# Altium PCB FlexLED.PcbDoc
Units mm, origin at the board's own origin, x right, y up, seen from the top; angles counter-clockwise.
Board outline 150 x 4 mm, 2 copper layers (Top Layer, Bottom Layer); 79 components, 154 nets, 466 pads, 150 vias.
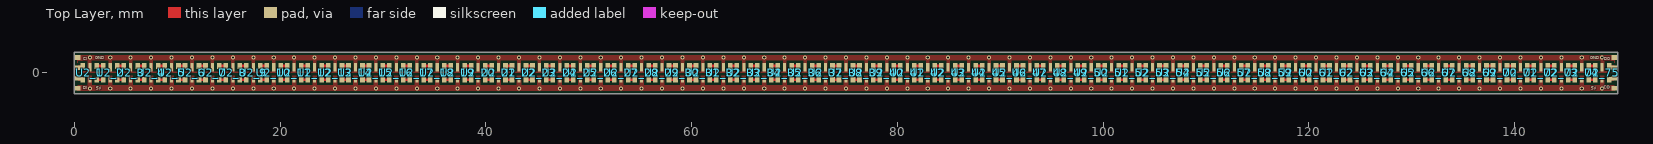
[diagram p0: Top Layer view]
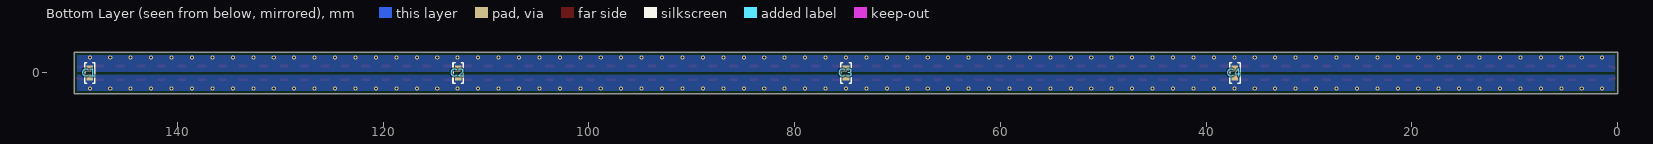
[diagram p1: Bottom Layer view, seen from below]
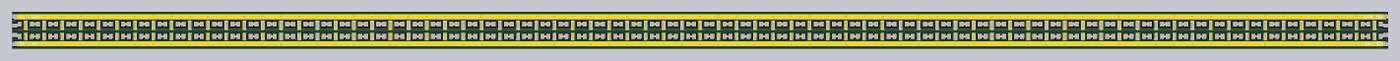
[diagram p2: 3D render of the assembled board from above, using the file's embedded part models]
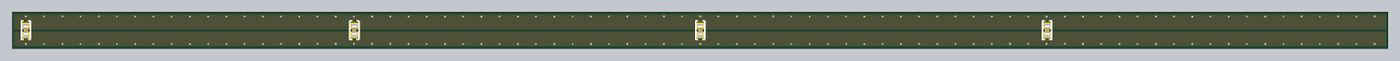
[diagram p3: 3D render of the assembled board from below, using the file's embedded part models]

## Layer stack, top to bottom
Top Solder: solder mask 0.0102, Solder Resist, Dk 3.5
Top Layer: signal copper 0.0356
Dielectric 1: dielectric 0.32, FR-4, Dk 4.8
Bottom Layer: signal copper 0.0356
Bottom Solder: solder mask 0.0102, Solder Resist, Dk 3.5

## Board outline
0,-2 0,2 150,2 150,-2

## Design rules (kind name [scope] priority, off if disabled: settings)
BoardOutlineClearance [All] p1: gap=0.254 ignorepadtopadclearanceinfootprint=FALSE except(0: Arc-SplitContinuation Track-SplitContinuation SMDPad-SplitContinuation THPad-SplitContinuation Via-SplitContinuation Fill-SplitContinuation Poly-SplitContinuation Region-SplitContinuation Text-SplitContinuation)
Clearance [All] p1: gap=0.254 ignorepadtopadclearanceinfootprint=FALSE except(0: Arc-Hole Track-Hole SMDPad-Hole THPad-Hole Via-Hole Fill-Hole Poly-Hole Region-Hole Text-Hole)
PolygonConnect [All] p1: connectstyle=Direct reliefconductorwidth=0.254 reliefentries=4 polygonreliefangle="90 Angle" airgapwidth=0.254
RoutingVias [All] p1: holewidth=0.711 width=1.27 viastyle="Through Hole" minholewidth=0.711 minwidth=1.27 maxholewidth=0.711 maxwidth=1.27
SolderMaskExpansion [All] p1: expansion=0.102 istentingtop=FALSE
Width [All] p1: maxlimit=0.254 minlimit=0.254 preferedwidth=0.254
30 further rules are at their usual default settings.

## Classes and differential pairs
component class top: C1 C2 C3 C4
component class U_APA10275: U2_75
component class U_APA10274: U2_74
component class U_APA10273: U2_73
component class U_APA10272: U2_72
component class U_APA10271: U2_71
component class U_APA10270: U2_70
component class U_APA10269: U2_69
component class U_APA10268: U2_68
component class U_APA10267: U2_67
component class U_APA10266: U2_66
channel class APA102: U_APA1021 U_APA1022 U_APA1023 U_APA1024 U_APA1025 U_APA1026 U_APA1027 U_APA1028 U_APA1029 U_APA10210 U_APA10211 U_APA10212 U_APA10213 U_APA10214 U_APA10215 U_APA10216 U_APA10217 U_APA10218 U_APA10219 U_APA10220 U_APA10221 U_APA10222 U_APA10223 U_APA10224 U_APA10225 U_APA10226 U_APA10227 U_APA10228 U_APA10229 U_APA10230 U_APA10231 U_APA10232 U_APA10233 U_APA10234 U_APA10235 U_APA10236 U_APA10237 U_APA10238 U_APA10239 U_APA10240 U_APA10241 U_APA10242 U_APA10243 U_APA10244 U_APA10245 U_APA10246 U_APA10247 U_APA10248 U_APA10249 U_APA10250 U_APA10251 U_APA10252 U_APA10253 U_APA10254 U_APA10255 U_APA10256 U_APA10257 U_APA10258 U_APA10259 U_APA10260 U_APA10261 U_APA10262 U_APA10263 U_APA10264 U_APA10265
net class DI[2..75]: DI2 DI3 DI4 DI5 DI6 DI7 DI8 DI9 DI10 DI11 DI12 DI13 DI14 DI15 DI16 DI17 DI18 DI19 DI20 DI21 DI22 DI23 DI24 DI25 DI26 DI27 DI28 DI29 DI30 DI31 DI32 DI33 DI34 DI35 DI36 DI37 DI38 DI39 DI40 DI41 DI42 DI43 DI44 DI45 DI46 DI47 DI48 DI49 DI50 DI51 DI52 DI53 DI54 DI55 DI56 DI57 DI58 DI59 DI60 DI61 DI62 DI63 DI64 DI65 DI66 DI67 DI68 DI69 DI70 DI71 DI72 DI73 DI74 DI75
net class CI[2..75]: CI2 CI3 CI4 CI5 CI6 CI7 CI8 CI9 CI10 CI11 CI12 CI13 CI14 CI15 CI16 CI17 CI18 CI19 CI20 CI21 CI22 CI23 CI24 CI25 CI26 CI27 CI28 CI29 CI30 CI31 CI32 CI33 CI34 CI35 CI36 CI37 CI38 CI39 CI40 CI41 CI42 CI43 CI44 CI45 CI46 CI47 CI48 CI49 CI50 CI51 CI52 CI53 CI54 CI55 CI56 CI57 CI58 CI59 CI60 CI61 CI62 CI63 CI64 CI65 CI66 CI67 CI68 CI69 CI70 CI71 CI72 CI73 CI74 CI75
component class U_APA10265: U2_65
component class U_APA10264: U2_64
component class U_APA10263: U2_63
component class U_APA10262: U2_62
component class U_APA10261: U2_61
component class U_APA10260: U2_60
component class U_APA10259: U2_59
component class U_APA10258: U2_58
component class U_APA10257: U2_57
component class U_APA10256: U2_56
component class U_APA10255: U2_55
component class U_APA10254: U2_54
component class U_APA10253: U2_53
component class U_APA10252: U2_52
component class U_APA10251: U2_51
component class U_APA10250: U2_50
component class U_APA10249: U2_49
component class U_APA10248: U2_48
component class U_APA10247: U2_47
component class U_APA10246: U2_46
component class U_APA10245: U2_45
component class U_APA10244: U2_44
component class U_APA10243: U2_43
component class U_APA10242: U2_42
component class U_APA10241: U2_41
component class U_APA10240: U2_40
component class U_APA10239: U2_39
component class U_APA10238: U2_38
component class U_APA10237: U2_37
component class U_APA10236: U2_36
component class U_APA10235: U2_35
component class U_APA10234: U2_34
component class U_APA10233: U2_33
component class U_APA10232: U2_32
component class U_APA10231: U2_31
component class U_APA10230: U2_30
component class U_APA10229: U2_29
component class U_APA10228: U2_28
component class U_APA10227: U2_27
component class U_APA10226: U2_26
component class U_APA10225: U2_25
component class U_APA10224: U2_24
component class U_APA10223: U2_23
component class U_APA10222: U2_22
component class U_APA10221: U2_21
component class U_APA10220: U2_20
component class U_APA10219: U2_19
component class U_APA10218: U2_18
component class U_APA10217: U2_17
component class U_APA10216: U2_16
component class U_APA10215: U2_15
component class U_APA10214: U2_14
component class U_APA10213: U2_13
component class U_APA10212: U2_12
component class U_APA10211: U2_11
component class U_APA10210: U2_10
component class U_APA1029: U2_9
component class U_APA1028: U2_8
component class U_APA1027: U2_7
component class U_APA1026: U2_6
component class U_APA1025: U2_5
component class U_APA1024: U2_4
component class U_APA1023: U2_3
component class U_APA1022: U2_2
component class U_APA1021: U2_1

## Components (designator, comment, footprint, x,y, rotation, side; value= is the part's Value field where it differs from the comment)
C1 "0.1µF" "CAP 0402_1005" 148.5,0 r270 bottom
C2 "0.1µF" "CAP 0402_1005" 112.7,0 r270 bottom
C3 "0.1µF" "CAP 0402_1005" 75,0 r270 bottom
C4 "0.1µF" "CAP 0402_1005" 37.2,0 r270 bottom
U2_1 "APA 102 2020" LED_APA-102-1515 1.5,0 r180 top (schematic designator U2)
U2_2 "APA 102 2020" LED_APA-102-1515 3.486,0 r180 top (schematic designator U2)
U2_3 "APA 102 2020" LED_APA-102-1515 5.473,0 r180 top (schematic designator U2)
U2_4 "APA 102 2020" LED_APA-102-1515 7.459,0 r180 top (schematic designator U2)
U2_5 "APA 102 2020" LED_APA-102-1515 9.446,0 r180 top (schematic designator U2)
U2_6 "APA 102 2020" LED_APA-102-1515 11.432,0 r180 top (schematic designator U2)
U2_7 "APA 102 2020" LED_APA-102-1515 13.419,0 r180 top (schematic designator U2)
U2_8 "APA 102 2020" LED_APA-102-1515 15.405,0 r180 top (schematic designator U2)
U2_9 "APA 102 2020" LED_APA-102-1515 17.392,0 r180 top (schematic designator U2)
U2_10 "APA 102 2020" LED_APA-102-1515 19.378,0 r180 top (schematic designator U2)
U2_11 "APA 102 2020" LED_APA-102-1515 21.365,0 r180 top (schematic designator U2)
U2_12 "APA 102 2020" LED_APA-102-1515 23.351,0 r180 top (schematic designator U2)
U2_13 "APA 102 2020" LED_APA-102-1515 25.338,0 r180 top (schematic designator U2)
U2_14 "APA 102 2020" LED_APA-102-1515 27.324,0 r180 top (schematic designator U2)
U2_15 "APA 102 2020" LED_APA-102-1515 29.311,0 r180 top (schematic designator U2)
U2_16 "APA 102 2020" LED_APA-102-1515 31.297,0 r180 top (schematic designator U2)
U2_17 "APA 102 2020" LED_APA-102-1515 33.284,0 r180 top (schematic designator U2)
U2_18 "APA 102 2020" LED_APA-102-1515 35.27,0 r180 top (schematic designator U2)
U2_19 "APA 102 2020" LED_APA-102-1515 37.257,0 r180 top (schematic designator U2)
U2_20 "APA 102 2020" LED_APA-102-1515 39.243,0 r180 top (schematic designator U2)
U2_21 "APA 102 2020" LED_APA-102-1515 41.23,0 r180 top (schematic designator U2)
U2_22 "APA 102 2020" LED_APA-102-1515 43.216,0 r180 top (schematic designator U2)
U2_23 "APA 102 2020" LED_APA-102-1515 45.203,0 r180 top (schematic designator U2)
U2_24 "APA 102 2020" LED_APA-102-1515 47.189,0 r180 top (schematic designator U2)
U2_25 "APA 102 2020" LED_APA-102-1515 49.176,0 r180 top (schematic designator U2)
U2_26 "APA 102 2020" LED_APA-102-1515 51.162,0 r180 top (schematic designator U2)
U2_27 "APA 102 2020" LED_APA-102-1515 53.149,0 r180 top (schematic designator U2)
U2_28 "APA 102 2020" LED_APA-102-1515 55.135,0 r180 top (schematic designator U2)
U2_29 "APA 102 2020" LED_APA-102-1515 57.122,0 r180 top (schematic designator U2)
U2_30 "APA 102 2020" LED_APA-102-1515 59.108,0 r180 top (schematic designator U2)
U2_31 "APA 102 2020" LED_APA-102-1515 61.095,0 r180 top (schematic designator U2)
U2_32 "APA 102 2020" LED_APA-102-1515 63.081,0 r180 top (schematic designator U2)
U2_33 "APA 102 2020" LED_APA-102-1515 65.068,0 r180 top (schematic designator U2)
U2_34 "APA 102 2020" LED_APA-102-1515 67.054,0 r180 top (schematic designator U2)
U2_35 "APA 102 2020" LED_APA-102-1515 69.041,0 r180 top (schematic designator U2)
U2_36 "APA 102 2020" LED_APA-102-1515 71.027,0 r180 top (schematic designator U2)
U2_37 "APA 102 2020" LED_APA-102-1515 73.013,0 r180 top (schematic designator U2)
U2_38 "APA 102 2020" LED_APA-102-1515 75,0 r180 top (schematic designator U2)
U2_39 "APA 102 2020" LED_APA-102-1515 76.986,0 r180 top (schematic designator U2)
U2_40 "APA 102 2020" LED_APA-102-1515 78.973,0 r180 top (schematic designator U2)
U2_41 "APA 102 2020" LED_APA-102-1515 80.959,0 r180 top (schematic designator U2)
U2_42 "APA 102 2020" LED_APA-102-1515 82.946,0 r180 top (schematic designator U2)
U2_43 "APA 102 2020" LED_APA-102-1515 84.932,0 r180 top (schematic designator U2)
U2_44 "APA 102 2020" LED_APA-102-1515 86.919,0 r180 top (schematic designator U2)
U2_45 "APA 102 2020" LED_APA-102-1515 88.905,0 r180 top (schematic designator U2)
U2_46 "APA 102 2020" LED_APA-102-1515 90.892,0 r180 top (schematic designator U2)
U2_47 "APA 102 2020" LED_APA-102-1515 92.878,0 r180 top (schematic designator U2)
U2_48 "APA 102 2020" LED_APA-102-1515 94.865,0 r180 top (schematic designator U2)
U2_49 "APA 102 2020" LED_APA-102-1515 96.851,0 r180 top (schematic designator U2)
U2_50 "APA 102 2020" LED_APA-102-1515 98.838,0 r180 top (schematic designator U2)
U2_51 "APA 102 2020" LED_APA-102-1515 100.824,0 r180 top (schematic designator U2)
U2_52 "APA 102 2020" LED_APA-102-1515 102.811,0 r180 top (schematic designator U2)
U2_53 "APA 102 2020" LED_APA-102-1515 104.797,0 r180 top (schematic designator U2)
U2_54 "APA 102 2020" LED_APA-102-1515 106.784,0 r180 top (schematic designator U2)
U2_55 "APA 102 2020" LED_APA-102-1515 108.77,0 r180 top (schematic designator U2)
U2_56 "APA 102 2020" LED_APA-102-1515 110.757,0 r180 top (schematic designator U2)
U2_57 "APA 102 2020" LED_APA-102-1515 112.743,0 r180 top (schematic designator U2)
U2_58 "APA 102 2020" LED_APA-102-1515 114.73,0 r180 top (schematic designator U2)
U2_59 "APA 102 2020" LED_APA-102-1515 116.716,0 r180 top (schematic designator U2)
U2_60 "APA 102 2020" LED_APA-102-1515 118.703,0 r180 top (schematic designator U2)
U2_61 "APA 102 2020" LED_APA-102-1515 120.689,0 r180 top (schematic designator U2)
U2_62 "APA 102 2020" LED_APA-102-1515 122.676,0 r180 top (schematic designator U2)
U2_63 "APA 102 2020" LED_APA-102-1515 124.662,0 r180 top (schematic designator U2)
U2_64 "APA 102 2020" LED_APA-102-1515 126.649,0 r180 top (schematic designator U2)
U2_65 "APA 102 2020" LED_APA-102-1515 128.635,0 r180 top (schematic designator U2)
U2_66 "APA 102 2020" LED_APA-102-1515 130.622,0 r180 top (schematic designator U2)
U2_67 "APA 102 2020" LED_APA-102-1515 132.608,0 r180 top (schematic designator U2)
U2_68 "APA 102 2020" LED_APA-102-1515 134.595,0 r180 top (schematic designator U2)
U2_69 "APA 102 2020" LED_APA-102-1515 136.581,0 r180 top (schematic designator U2)
U2_70 "APA 102 2020" LED_APA-102-1515 138.568,0 r180 top (schematic designator U2)
U2_71 "APA 102 2020" LED_APA-102-1515 140.554,0 r180 top (schematic designator U2)
U2_72 "APA 102 2020" LED_APA-102-1515 142.54,0 r180 top (schematic designator U2)
U2_73 "APA 102 2020" LED_APA-102-1515 144.527,0 r180 top (schematic designator U2)
U2_74 "APA 102 2020" LED_APA-102-1515 146.513,0 r180 top (schematic designator U2)
U2_75 "APA 102 2020" LED_APA-102-1515 148.5,0 r180 top (schematic designator U2)

## Footprints (in the part's own frame and the unit in brackets; to place one, negate y for a bottom-side part, rotate by r counter-clockwise, add the part's x,y. Pads: shape width x height; smd on the part's side, far side on the other; paste and mask are expansions set on the pad)
"CAP 0402_1005" [mm] "Chip Capacitor, 2-Leads, Body 1.02x0.51mm, IPC Medium Density"
  rect 0.6x0.64 smd: 1(-0.44,0) 2(0.44,0)
  silkscreen extent -1,-0.5 1,0.5, body extent -0.5,-0.26 0.5,0.26, height 0.52
LED_APA-102-1515 [mm]
  rect 0.3x0.8 smd: 1(0,-0.55)
  rect 0.45x0.55 smd: 2(-0.675,-0.675) 3(-0.675,0.675) 5(0.675,0.675) 6(0.675,-0.675)
  rect 0.3x0.55 smd: 4(0,0.675)
  body extent -0.8,-0.8 0.8,0.8, height 0.9

## Part data
C1 C2 C3 C4: library part VJ0402V104ZXJCW1BC, "CAP CER 0.1UF 16V Y5V 0402", Device Package="0402 (1005 Metric)", Manufacturer="Vishay Vitramon", Operating Temperature="-30°C ~ 85°C", Supplier Part Number 1=720-1523-1-ND, Temperature Coefficient="Y5V (F)", Tolerance="-20%, +80%", Voltage - Rated=16V, Applications="General Purpose", Capacitance=0.1µF, ComponentLink1Description=Datasheet, ComponentLink1URL=https://www.vishay.com/docs/28548/vjw1bcbascomseries.pdf, ComponentLink2Description="DigiKey Link", ComponentLink2URL=http://digikey.com/product-detail/en/vishay-vitramon/VJ0402V104ZXJCW1BC/720-1523-1-ND/420979, LastUpdated="9/2/2020 1:01:27 AM", Lifecycle Status=Active, Minimum Order=1, Mounting Type="Surface Mount, MLCC", Package / Case="0402 (1005 Metric)", Packaging=TapeAndReel, Part Number=VJ0402V104ZXJCW1BC, Part Status=Active, PartId=12979, Price=0.01, Series=VJ, Size / Dimension="0.039\" L x 0.020\" W (1.00mm x 0.50mm)", Supplier 1=DigiKey, Thickness (Max)="0.022\" (0.55mm)"
U2_1 U2_2 U2_3 U2_4 U2_5 U2_6 U2_7 U2_8 U2_9 U2_10 U2_11 U2_12 U2_13 U2_14 U2_15 U2_16 U2_17 U2_18 U2_19 U2_20 U2_21 U2_22 U2_23 U2_24 U2_25 U2_26 U2_27 U2_28 U2_29 U2_30 U2_31 U2_32 U2_33 U2_34 U2_35 U2_36 U2_37 U2_38 U2_39 U2_40 U2_41 U2_42 U2_43 U2_44 U2_45 U2_46 U2_47 U2_48 U2_49 U2_50 U2_51 U2_52 U2_53 U2_54 U2_55 U2_56 U2_57 U2_58 U2_59 U2_60 U2_61 U2_62 U2_63 U2_64 U2_65 U2_66 U2_67 U2_68 U2_69 U2_70 U2_71 U2_72 U2_73 U2_74 U2_75: library part APA-102-1515, "8-pin type LED three-color RGB Dimming control", Package="SMD-8 iPixel LED Light Co.", Availability=Unavailable, MF="iPixel LED Light Co.", MP=APA-102-2020-256-8, Price=None, SnapEDA_Link=https://www.snapeda.com/parts/APA-102-2020-256-8/iPixel%20LED%20Light%20Co./view-part/698331/?ref=snap

## Free pads (board coordinates)
  rect 0.55x0.45 smd: 2(0.3,-1.5) 2(0.3,-0.5) 2(0.3,0.5) 2(0.3,1.5) 2(149.7,-1.5) 2(149.7,-0.5) 2(149.7,0.5) 2(149.7,1.5)

## Via types
v1: diameter 0.4, hole 0.2, Top Layer to Bottom Layer, tented both sides, 150 vias

## Nets (pads, with @x,y where several pads share a name; then routed paths per layer and width w, separated by ;. In a path a pad name is that pad's centre, name@x,y a point inside that pad or via, vN(x,y) a via of type N, cw(c..) or ccw(c..) an arc to the next point about the centre after c; other vN are vias at no path point)
5V: C1.2 C2.2 C3.2 C4.2 pad.2@0.3,-1.5 pad.2@149.7,-1.5 U2_1.4 U2_2.4 U2_3.4 U2_4.4 U2_5.4 U2_6.4 U2_7.4 U2_8.4 U2_9.4 U2_10.4 U2_11.4 U2_12.4 U2_13.4 U2_14.4 U2_15.4 U2_16.4 U2_17.4 U2_18.4 U2_19.4 U2_20.4 U2_21.4 U2_22.4 U2_23.4 U2_24.4 U2_25.4 U2_26.4 U2_27.4 U2_28.4 U2_29.4 U2_30.4 U2_31.4 U2_32.4 U2_33.4 U2_34.4 U2_35.4 U2_36.4 U2_37.4 U2_38.4 U2_39.4 U2_40.4 U2_41.4 U2_42.4 U2_43.4 U2_44.4 U2_45.4 U2_46.4 U2_47.4 U2_48.4 U2_49.4 U2_50.4 U2_51.4 U2_52.4 U2_53.4 U2_54.4 U2_55.4 U2_56.4 U2_57.4 U2_58.4 U2_59.4 U2_60.4 U2_61.4 U2_62.4 U2_63.4 U2_64.4 U2_65.4 U2_66.4 U2_67.4 U2_68.4 U2_69.4 U2_70.4 U2_71.4 U2_72.4 U2_73.4 U2_74.4 U2_75.4
  other v1: 1.5,-1.5 3.486,-1.5 5.473,-1.5 7.459,-1.5 9.446,-1.5 11.432,-1.5 13.419,-1.5 15.405,-1.5 17.392,-1.5 19.378,-1.5 21.365,-1.5 23.351,-1.5 25.338,-1.5 27.324,-1.5 29.311,-1.5 31.297,-1.5 33.284,-1.5 35.27,-1.5 37.257,-1.5 39.243,-1.5 41.23,-1.5 43.216,-1.5 45.203,-1.5 47.189,-1.5 49.176,-1.5 51.162,-1.5 53.149,-1.5 55.135,-1.5 57.122,-1.5 59.108,-1.5 61.095,-1.5 63.081,-1.5 65.068,-1.5 67.054,-1.5 69.041,-1.5 71.027,-1.5 73.013,-1.5 75,-1.5 76.986,-1.5 78.973,-1.5 80.959,-1.5 82.946,-1.5 84.932,-1.5 86.919,-1.5 88.905,-1.5 90.892,-1.5 92.878,-1.5 94.865,-1.5 96.851,-1.5 98.838,-1.5 100.824,-1.5 102.811,-1.5 104.797,-1.5 106.784,-1.5 108.77,-1.5 110.757,-1.5 112.743,-1.5 114.73,-1.5 116.716,-1.5 118.703,-1.5 120.689,-1.5 122.676,-1.5 124.662,-1.5 126.649,-1.5 128.635,-1.5 130.622,-1.5 132.608,-1.5 134.595,-1.5 136.581,-1.5 138.568,-1.5 140.554,-1.5 142.54,-1.5 144.527,-1.5 146.513,-1.5 148.5,-1.5
CI1: pad.2@0.3,-0.5 U2_1.5 | length 0.6
  Top Layer w0.254: pad.2@0.3,-0.5 0.448,-0.598 0.727,-0.598 U2_1.5
CI2: U2_1.3 U2_2.5 | length 0.6
  Top Layer w0.254: U2_1.3 U2_2.5
CI3: U2_2.3 U2_3.5 | length 0.6
  Top Layer w0.254: U2_2.3 U2_3.5
CI4: U2_3.3 U2_4.5 | length 0.6
  Top Layer w0.254: U2_3.3 U2_4.5
CI5: U2_4.3 U2_5.5 | length 0.6
  Top Layer w0.254: U2_4.3 U2_5.5
CI6: U2_5.3 U2_6.5 | length 0.6
  Top Layer w0.254: U2_5.3 U2_6.5
CI7: U2_6.3 U2_7.5 | length 0.6
  Top Layer w0.254: U2_6.3 U2_7.5
CI8: U2_7.3 U2_8.5 | length 0.6
  Top Layer w0.254: U2_7.3 U2_8.5
CI9: U2_8.3 U2_9.5 | length 0.6
  Top Layer w0.254: U2_8.3 U2_9.5
CI10: U2_9.3 U2_10.5 | length 0.6
  Top Layer w0.254: U2_9.3 U2_10.5
CI11: U2_10.3 U2_11.5 | length 0.6
  Top Layer w0.254: U2_10.3 U2_11.5
CI12: U2_11.3 U2_12.5 | length 0.6
  Top Layer w0.254: U2_11.3 U2_12.5
CI13: U2_12.3 U2_13.5 | length 0.6
  Top Layer w0.254: U2_12.3 U2_13.5
CI14: U2_13.3 U2_14.5 | length 0.6
  Top Layer w0.254: U2_13.3 U2_14.5
CI15: U2_14.3 U2_15.5 | length 0.6
  Top Layer w0.254: U2_14.3 U2_15.5
CI16: U2_15.3 U2_16.5 | length 0.6
  Top Layer w0.254: U2_15.3 U2_16.5
CI17: U2_16.3 U2_17.5 | length 0.6
  Top Layer w0.254: U2_16.3 U2_17.5
CI18: U2_17.3 U2_18.5 | length 0.6
  Top Layer w0.254: U2_17.3 U2_18.5
CI19: U2_18.3 U2_19.5 | length 0.6
  Top Layer w0.254: U2_18.3 U2_19.5
CI20: U2_19.3 U2_20.5 | length 0.6
  Top Layer w0.254: U2_19.3 U2_20.5
CI21: U2_20.3 U2_21.5 | length 0.6
  Top Layer w0.254: U2_20.3 U2_21.5
CI22: U2_21.3 U2_22.5 | length 0.6
  Top Layer w0.254: U2_21.3 U2_22.5
CI23: U2_22.3 U2_23.5 | length 0.6
  Top Layer w0.254: U2_22.3 U2_23.5
CI24: U2_23.3 U2_24.5 | length 0.6
  Top Layer w0.254: U2_23.3 U2_24.5
CI25: U2_24.3 U2_25.5 | length 0.6
  Top Layer w0.254: U2_24.3 U2_25.5
CI26: U2_25.3 U2_26.5 | length 0.6
  Top Layer w0.254: U2_25.3 U2_26.5
CI27: U2_26.3 U2_27.5 | length 0.6
  Top Layer w0.254: U2_26.3 U2_27.5
CI28: U2_27.3 U2_28.5 | length 0.6
  Top Layer w0.254: U2_27.3 U2_28.5
CI29: U2_28.3 U2_29.5 | length 0.6
  Top Layer w0.254: U2_28.3 U2_29.5
CI30: U2_29.3 U2_30.5 | length 0.6
  Top Layer w0.254: U2_29.3 U2_30.5
CI31: U2_30.3 U2_31.5 | length 0.6
  Top Layer w0.254: U2_30.3 U2_31.5
CI32: U2_31.3 U2_32.5 | length 0.6
  Top Layer w0.254: U2_31.3 U2_32.5
CI33: U2_32.3 U2_33.5 | length 0.6
  Top Layer w0.254: U2_32.3 U2_33.5
CI34: U2_33.3 U2_34.5 | length 0.6
  Top Layer w0.254: U2_33.3 U2_34.5
CI35: U2_34.3 U2_35.5 | length 0.6
  Top Layer w0.254: U2_34.3 U2_35.5
CI36: U2_35.3 U2_36.5 | length 0.6
  Top Layer w0.254: U2_35.3 U2_36.5
CI37: U2_36.3 U2_37.5 | length 0.6
  Top Layer w0.254: U2_36.3 U2_37.5
CI38: U2_37.3 U2_38.5 | length 0.6
  Top Layer w0.254: U2_37.3 U2_38.5
CI39: U2_38.3 U2_39.5 | length 0.6
  Top Layer w0.254: U2_38.3 U2_39.5
CI40: U2_39.3 U2_40.5 | length 0.6
  Top Layer w0.254: U2_39.3 U2_40.5
CI41: U2_40.3 U2_41.5 | length 0.6
  Top Layer w0.254: U2_40.3 U2_41.5
CI42: U2_41.3 U2_42.5 | length 0.6
  Top Layer w0.254: U2_41.3 U2_42.5
CI43: U2_42.3 U2_43.5 | length 0.6
  Top Layer w0.254: U2_42.3 U2_43.5
CI44: U2_43.3 U2_44.5 | length 0.6
  Top Layer w0.254: U2_43.3 U2_44.5
CI45: U2_44.3 U2_45.5 | length 0.6
  Top Layer w0.254: U2_44.3 U2_45.5
CI46: U2_45.3 U2_46.5 | length 0.6
  Top Layer w0.254: U2_45.3 U2_46.5
CI47: U2_46.3 U2_47.5 | length 0.6
  Top Layer w0.254: U2_46.3 U2_47.5
CI48: U2_47.3 U2_48.5 | length 0.6
  Top Layer w0.254: U2_47.3 U2_48.5
CI49: U2_48.3 U2_49.5 | length 0.6
  Top Layer w0.254: U2_48.3 U2_49.5
CI50: U2_49.3 U2_50.5 | length 0.6
  Top Layer w0.254: U2_49.3 U2_50.5
CI51: U2_50.3 U2_51.5 | length 0.6
  Top Layer w0.254: U2_50.3 U2_51.5
CI52: U2_51.3 U2_52.5 | length 0.6
  Top Layer w0.254: U2_51.3 U2_52.5
CI53: U2_52.3 U2_53.5 | length 0.6
  Top Layer w0.254: U2_52.3 U2_53.5
CI54: U2_53.3 U2_54.5 | length 0.6
  Top Layer w0.254: U2_53.3 U2_54.5
CI55: U2_54.3 U2_55.5 | length 0.6
  Top Layer w0.254: U2_54.3 U2_55.5
CI56: U2_55.3 U2_56.5 | length 0.6
  Top Layer w0.254: U2_55.3 U2_56.5
CI57: U2_56.3 U2_57.5 | length 0.6
  Top Layer w0.254: U2_56.3 U2_57.5
CI58: U2_57.3 U2_58.5 | length 0.6
  Top Layer w0.254: U2_57.3 U2_58.5
CI59: U2_58.3 U2_59.5 | length 0.6
  Top Layer w0.254: U2_58.3 U2_59.5
CI60: U2_59.3 U2_60.5 | length 0.6
  Top Layer w0.254: U2_59.3 U2_60.5
CI61: U2_60.3 U2_61.5 | length 0.6
  Top Layer w0.254: U2_60.3 U2_61.5
CI62: U2_61.3 U2_62.5 | length 0.6
  Top Layer w0.254: U2_61.3 U2_62.5
CI63: U2_62.3 U2_63.5 | length 0.6
  Top Layer w0.254: U2_62.3 U2_63.5
CI64: U2_63.3 U2_64.5 | length 0.6
  Top Layer w0.254: U2_63.3 U2_64.5
CI65: U2_64.3 U2_65.5 | length 0.6
  Top Layer w0.254: U2_64.3 U2_65.5
CI66: U2_65.3 U2_66.5 | length 0.6
  Top Layer w0.254: U2_65.3 U2_66.5
CI67: U2_66.3 U2_67.5 | length 0.6
  Top Layer w0.254: U2_66.3 U2_67.5
CI68: U2_67.3 U2_68.5 | length 0.6
  Top Layer w0.254: U2_67.3 U2_68.5
CI69: U2_68.3 U2_69.5 | length 0.6
  Top Layer w0.254: U2_68.3 U2_69.5
CI70: U2_69.3 U2_70.5 | length 0.6
  Top Layer w0.254: U2_69.3 U2_70.5
CI71: U2_70.3 U2_71.5 | length 0.6
  Top Layer w0.254: U2_70.3 U2_71.5
CI72: U2_71.3 U2_72.5 | length 0.6
  Top Layer w0.254: U2_71.3 U2_72.5
CI73: U2_72.3 U2_73.5 | length 0.6
  Top Layer w0.254: U2_72.3 U2_73.5
CI74: U2_73.3 U2_74.5 | length 0.6
  Top Layer w0.254: U2_73.3 U2_74.5
CI75: U2_74.3 U2_75.5 | length 0.6
  Top Layer w0.254: U2_74.3 U2_75.5
CO75: pad.2@149.7,-0.5 U2_75.3 | length 0.6
  Top Layer w0.254: U2_75.3 149.273,-0.598 149.552,-0.598 pad.2@149.7,-0.5
DI1: pad.2@0.3,0.5 U2_1.6 | length 0.6
  Top Layer w0.254: pad.2@0.3,0.5 0.448,0.598 0.727,0.598 U2_1.6
DI2: U2_1.2 U2_2.6 | length 0.6
  Top Layer w0.254: U2_1.2 U2_2.6
DI3: U2_2.2 U2_3.6 | length 0.6
  Top Layer w0.254: U2_2.2 U2_3.6
DI4: U2_3.2 U2_4.6 | length 0.6
  Top Layer w0.254: U2_3.2 U2_4.6
DI5: U2_4.2 U2_5.6 | length 0.6
  Top Layer w0.254: U2_4.2 U2_5.6
DI6: U2_5.2 U2_6.6 | length 0.6
  Top Layer w0.254: U2_5.2 U2_6.6
DI7: U2_6.2 U2_7.6 | length 0.6
  Top Layer w0.254: U2_6.2 U2_7.6
DI8: U2_7.2 U2_8.6 | length 0.6
  Top Layer w0.254: U2_7.2 U2_8.6
DI9: U2_8.2 U2_9.6 | length 0.6
  Top Layer w0.254: U2_8.2 U2_9.6
DI10: U2_9.2 U2_10.6 | length 0.6
  Top Layer w0.254: U2_9.2 U2_10.6
DI11: U2_10.2 U2_11.6 | length 0.6
  Top Layer w0.254: U2_10.2 U2_11.6
DI12: U2_11.2 U2_12.6 | length 0.6
  Top Layer w0.254: U2_11.2 U2_12.6
DI13: U2_12.2 U2_13.6 | length 0.6
  Top Layer w0.254: U2_12.2 U2_13.6
DI14: U2_13.2 U2_14.6 | length 0.6
  Top Layer w0.254: U2_13.2 U2_14.6
DI15: U2_14.2 U2_15.6 | length 0.6
  Top Layer w0.254: U2_14.2 U2_15.6
DI16: U2_15.2 U2_16.6 | length 0.6
  Top Layer w0.254: U2_15.2 U2_16.6
DI17: U2_16.2 U2_17.6 | length 0.6
  Top Layer w0.254: U2_16.2 U2_17.6
DI18: U2_17.2 U2_18.6 | length 0.6
  Top Layer w0.254: U2_17.2 U2_18.6
DI19: U2_18.2 U2_19.6 | length 0.6
  Top Layer w0.254: U2_18.2 U2_19.6
DI20: U2_19.2 U2_20.6 | length 0.6
  Top Layer w0.254: U2_19.2 U2_20.6
DI21: U2_20.2 U2_21.6 | length 0.6
  Top Layer w0.254: U2_20.2 U2_21.6
DI22: U2_21.2 U2_22.6 | length 0.6
  Top Layer w0.254: U2_21.2 U2_22.6
DI23: U2_22.2 U2_23.6 | length 0.6
  Top Layer w0.254: U2_22.2 U2_23.6
DI24: U2_23.2 U2_24.6 | length 0.6
  Top Layer w0.254: U2_23.2 U2_24.6
DI25: U2_24.2 U2_25.6 | length 0.6
  Top Layer w0.254: U2_24.2 U2_25.6
DI26: U2_25.2 U2_26.6 | length 0.6
  Top Layer w0.254: U2_25.2 U2_26.6
DI27: U2_26.2 U2_27.6 | length 0.6
  Top Layer w0.254: U2_26.2 U2_27.6
DI28: U2_27.2 U2_28.6 | length 0.6
  Top Layer w0.254: U2_27.2 U2_28.6
DI29: U2_28.2 U2_29.6 | length 0.6
  Top Layer w0.254: U2_28.2 U2_29.6
DI30: U2_29.2 U2_30.6 | length 0.6
  Top Layer w0.254: U2_29.2 U2_30.6
DI31: U2_30.2 U2_31.6 | length 0.6
  Top Layer w0.254: U2_30.2 U2_31.6
DI32: U2_31.2 U2_32.6 | length 0.6
  Top Layer w0.254: U2_31.2 U2_32.6
DI33: U2_32.2 U2_33.6 | length 0.6
  Top Layer w0.254: U2_32.2 U2_33.6
DI34: U2_33.2 U2_34.6 | length 0.6
  Top Layer w0.254: U2_33.2 U2_34.6
DI35: U2_34.2 U2_35.6 | length 0.6
  Top Layer w0.254: U2_34.2 U2_35.6
DI36: U2_35.2 U2_36.6 | length 0.6
  Top Layer w0.254: U2_35.2 U2_36.6
DI37: U2_36.2 U2_37.6 | length 0.6
  Top Layer w0.254: U2_36.2 U2_37.6
DI38: U2_37.2 U2_38.6 | length 0.6
  Top Layer w0.254: U2_37.2 U2_38.6
DI39: U2_38.2 U2_39.6 | length 0.6
  Top Layer w0.254: U2_38.2 U2_39.6
DI40: U2_39.2 U2_40.6 | length 0.6
  Top Layer w0.254: U2_39.2 U2_40.6
DI41: U2_40.2 U2_41.6 | length 0.6
  Top Layer w0.254: U2_40.2 U2_41.6
DI42: U2_41.2 U2_42.6 | length 0.6
  Top Layer w0.254: U2_41.2 U2_42.6
DI43: U2_42.2 U2_43.6 | length 0.6
  Top Layer w0.254: U2_42.2 U2_43.6
DI44: U2_43.2 U2_44.6 | length 0.6
  Top Layer w0.254: U2_43.2 U2_44.6
DI45: U2_44.2 U2_45.6 | length 0.6
  Top Layer w0.254: U2_44.2 U2_45.6
DI46: U2_45.2 U2_46.6 | length 0.6
  Top Layer w0.254: U2_45.2 U2_46.6
DI47: U2_46.2 U2_47.6 | length 0.6
  Top Layer w0.254: U2_46.2 U2_47.6
DI48: U2_47.2 U2_48.6 | length 0.6
  Top Layer w0.254: U2_47.2 U2_48.6
DI49: U2_48.2 U2_49.6 | length 0.6
  Top Layer w0.254: U2_48.2 U2_49.6
DI50: U2_49.2 U2_50.6 | length 0.6
  Top Layer w0.254: U2_49.2 U2_50.6
DI51: U2_50.2 U2_51.6 | length 0.6
  Top Layer w0.254: U2_50.2 U2_51.6
DI52: U2_51.2 U2_52.6 | length 0.6
  Top Layer w0.254: U2_51.2 U2_52.6
DI53: U2_52.2 U2_53.6 | length 0.6
  Top Layer w0.254: U2_52.2 U2_53.6
DI54: U2_53.2 U2_54.6 | length 0.6
  Top Layer w0.254: U2_53.2 U2_54.6
DI55: U2_54.2 U2_55.6 | length 0.6
  Top Layer w0.254: U2_54.2 U2_55.6
DI56: U2_55.2 U2_56.6 | length 0.6
  Top Layer w0.254: U2_55.2 U2_56.6
DI57: U2_56.2 U2_57.6 | length 0.6
  Top Layer w0.254: U2_56.2 U2_57.6
DI58: U2_57.2 U2_58.6 | length 0.6
  Top Layer w0.254: U2_57.2 U2_58.6
DI59: U2_58.2 U2_59.6 | length 0.6
  Top Layer w0.254: U2_58.2 U2_59.6
DI60: U2_59.2 U2_60.6 | length 0.6
  Top Layer w0.254: U2_59.2 U2_60.6
DI61: U2_60.2 U2_61.6 | length 0.6
  Top Layer w0.254: U2_60.2 U2_61.6
DI62: U2_61.2 U2_62.6 | length 0.6
  Top Layer w0.254: U2_61.2 U2_62.6
DI63: U2_62.2 U2_63.6 | length 0.6
  Top Layer w0.254: U2_62.2 U2_63.6
DI64: U2_63.2 U2_64.6 | length 0.6
  Top Layer w0.254: U2_63.2 U2_64.6
DI65: U2_64.2 U2_65.6 | length 0.6
  Top Layer w0.254: U2_64.2 U2_65.6
DI66: U2_65.2 U2_66.6 | length 0.6
  Top Layer w0.254: U2_65.2 U2_66.6
DI67: U2_66.2 U2_67.6 | length 0.6
  Top Layer w0.254: U2_66.2 U2_67.6
DI68: U2_67.2 U2_68.6 | length 0.6
  Top Layer w0.254: U2_67.2 U2_68.6
DI69: U2_68.2 U2_69.6 | length 0.6
  Top Layer w0.254: U2_68.2 U2_69.6
DI70: U2_69.2 U2_70.6 | length 0.6
  Top Layer w0.254: U2_69.2 U2_70.6
DI71: U2_70.2 U2_71.6 | length 0.6
  Top Layer w0.254: U2_70.2 U2_71.6
DI72: U2_71.2 U2_72.6 | length 0.6
  Top Layer w0.254: U2_71.2 U2_72.6
DI73: U2_72.2 U2_73.6 | length 0.6
  Top Layer w0.254: U2_72.2 U2_73.6
DI74: U2_73.2 U2_74.6 | length 0.6
  Top Layer w0.254: U2_73.2 U2_74.6
DI75: U2_74.2 U2_75.6 | length 0.6
  Top Layer w0.254: U2_74.2 U2_75.6
DO75: pad.2@149.7,0.5 U2_75.2 | length 0.5
  Top Layer w0.254: U2_75.2 149.273,0.6 pad.2@149.619,0.6
GND: C1.1 C2.1 C3.1 C4.1 pad.2@0.3,1.5 pad.2@149.7,1.5 U2_1.1 U2_2.1 U2_3.1 U2_4.1 U2_5.1 U2_6.1 U2_7.1 U2_8.1 U2_9.1 U2_10.1 U2_11.1 U2_12.1 U2_13.1 U2_14.1 U2_15.1 U2_16.1 U2_17.1 U2_18.1 U2_19.1 U2_20.1 U2_21.1 U2_22.1 U2_23.1 U2_24.1 U2_25.1 U2_26.1 U2_27.1 U2_28.1 U2_29.1 U2_30.1 U2_31.1 U2_32.1 U2_33.1 U2_34.1 U2_35.1 U2_36.1 U2_37.1 U2_38.1 U2_39.1 U2_40.1 U2_41.1 U2_42.1 U2_43.1 U2_44.1 U2_45.1 U2_46.1 U2_47.1 U2_48.1 U2_49.1 U2_50.1 U2_51.1 U2_52.1 U2_53.1 U2_54.1 U2_55.1 U2_56.1 U2_57.1 U2_58.1 U2_59.1 U2_60.1 U2_61.1 U2_62.1 U2_63.1 U2_64.1 U2_65.1 U2_66.1 U2_67.1 U2_68.1 U2_69.1 U2_70.1 U2_71.1 U2_72.1 U2_73.1 U2_74.1 U2_75.1
  other v1: 1.5,1.5 3.486,1.5 5.473,1.5 7.459,1.5 9.446,1.5 11.432,1.5 13.419,1.5 15.405,1.5 17.392,1.5 19.378,1.5 21.365,1.5 23.351,1.5 25.338,1.5 27.324,1.5 29.311,1.5 31.297,1.5 33.284,1.5 35.27,1.5 37.257,1.5 39.243,1.5 41.23,1.5 43.216,1.5 45.203,1.5 47.189,1.5 49.176,1.5 51.162,1.5 53.149,1.5 55.135,1.5 57.122,1.5 59.108,1.5 61.095,1.5 63.081,1.5 65.068,1.5 67.054,1.5 69.041,1.5 71.027,1.5 73.013,1.5 75,1.5 76.986,1.5 78.973,1.5 80.959,1.5 82.946,1.5 84.932,1.5 86.919,1.5 88.905,1.5 90.892,1.5 92.878,1.5 94.865,1.5 96.851,1.5 98.838,1.5 100.824,1.5 102.811,1.5 104.797,1.5 106.784,1.5 108.77,1.5 110.757,1.5 112.743,1.5 114.73,1.5 116.716,1.5 118.703,1.5 120.689,1.5 122.676,1.5 124.662,1.5 126.649,1.5 128.635,1.5 130.622,1.5 132.608,1.5 134.595,1.5 136.581,1.5 138.568,1.5 140.554,1.5 142.54,1.5 144.527,1.5 146.513,1.5 148.5,1.5

## Polygon pours and split planes (outlines as drawn)
GND on Top Layer "GND_L01_P000" (solid, pour order 0): -0.9,0 -0.9,2.4 151.2,2.4 151.2,0
5V on Top Layer "5V_L01_P001" (solid, pour order 1): -0.9,0 -0.9,-2.2 151.1,-2.2 151.1,0
no net on Top Solder (solid): 0.6,-1.8 150,-1.8 150,-1.2 0.6,-1.2
no net on Top Solder (solid): 0.6,1.2 150,1.2 150,1.8 0.6,1.8
GND on Bottom Layer "GND_L02_P002" (solid, pour order 2): -0.9,0.1 -0.9,2.4 150,2.4 150,0.1
5V on Bottom Layer "5V_L02_P003" (solid, pour order 3): -0.9,0 -0.9,-2.2 150,-2.2 150,0

## Silkscreen, mask and mechanical layers (free items; w line width, h text height)
Top Overlay:
  text "GND" at 2.05,1.35 h0.3
  text "GND" at 147.35,1.35 h0.3
  text "CI" at 0.879,1.254 h0.3
  text "DO" at 148.677,1.254 h0.3
  text "CO" at 148.65,-1.55 h0.3
  text "DI" at 0.879,-1.577 h0.3
  text "5V" at 2.15,-1.65 h0.3
  text "5V" at 147.45,-1.65 h0.3
Mechanical 1:
  the board outline again, w0.254